# EAGLE board atmega-keyboard-v2 (EAGLE 6.2)
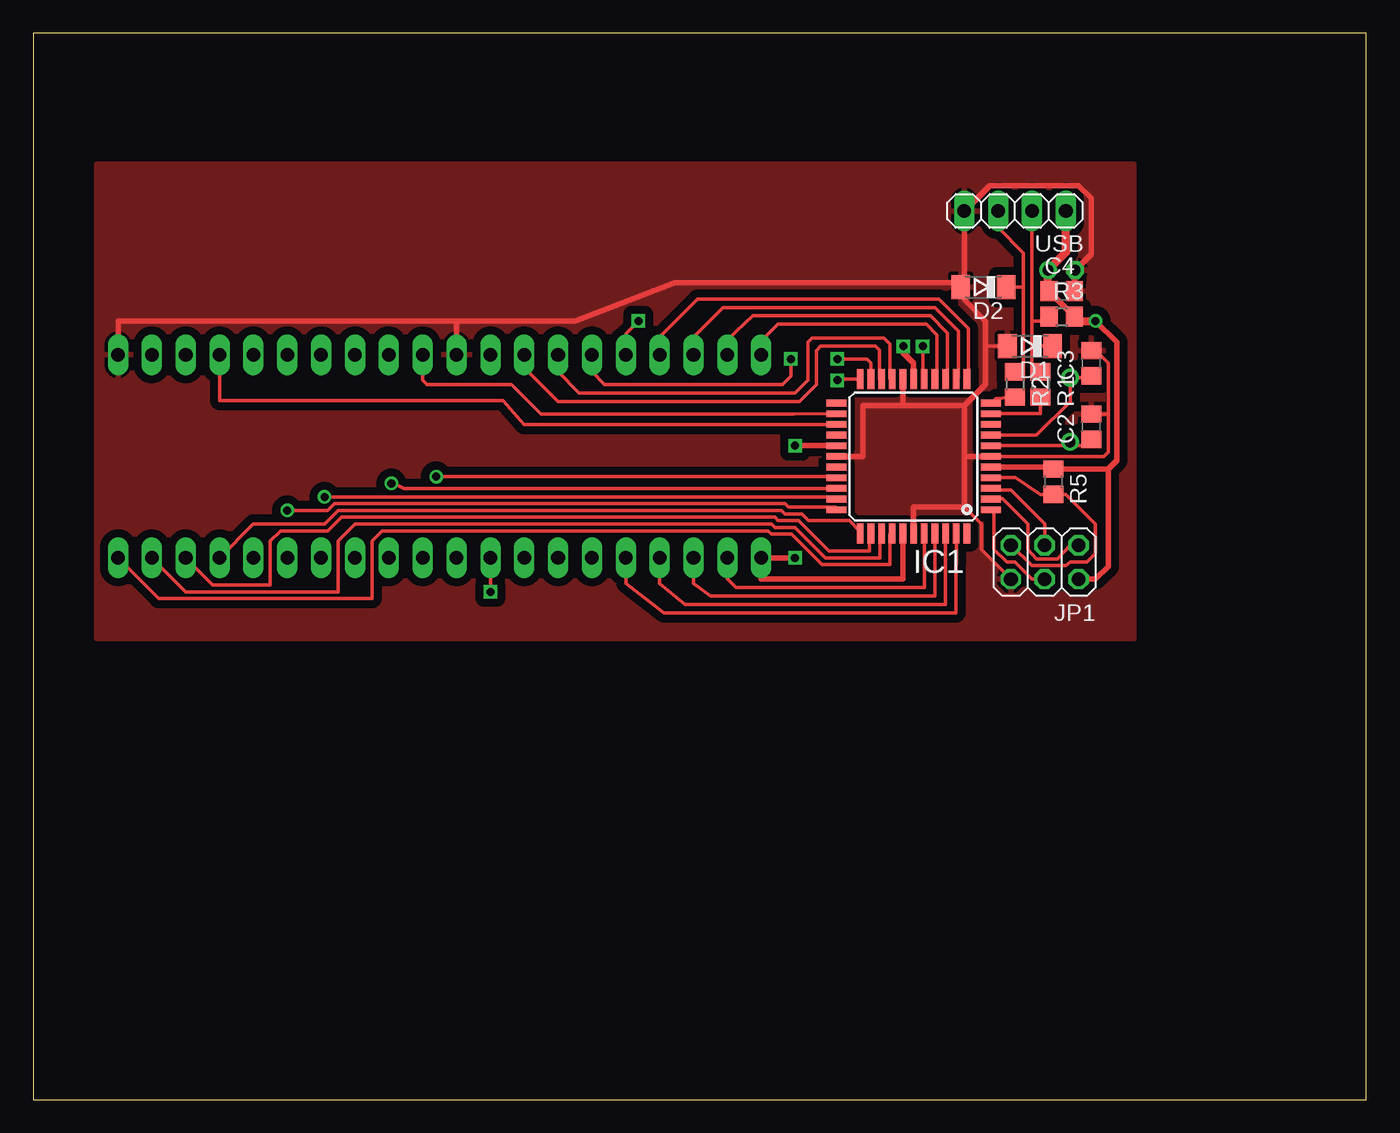
[diagram p0: board, top side]
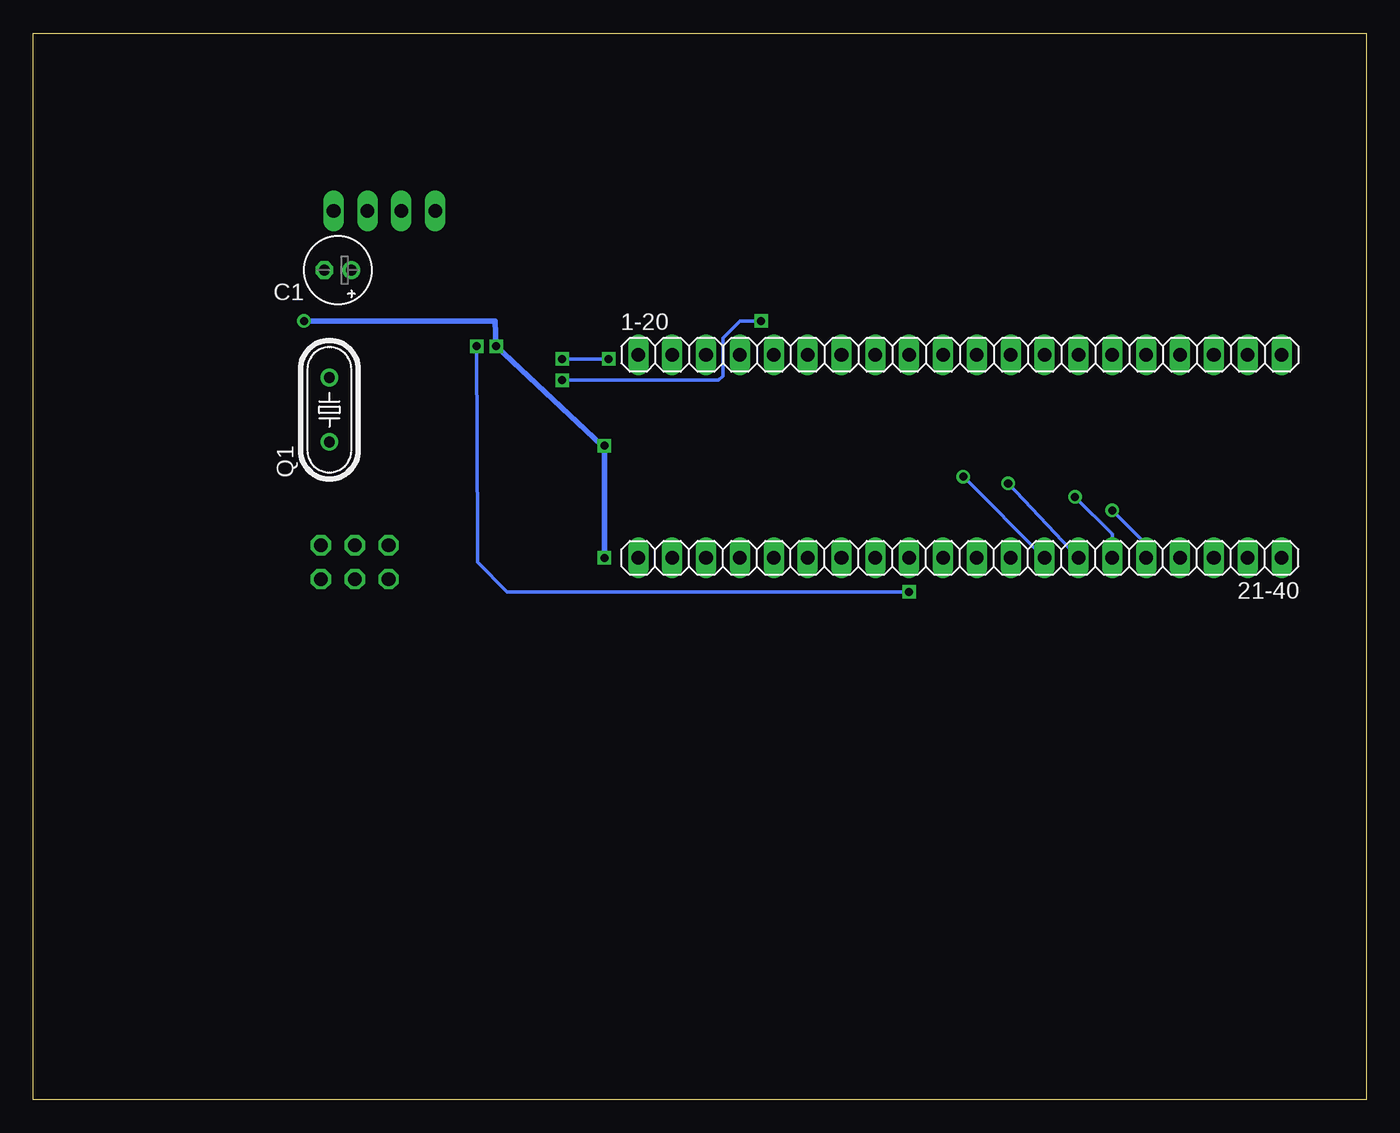
[diagram p1: board, bottom side, seen from below]

Size 100 x 80 mm. Coordinates in mm from the lower left corner, seen from the top.
Outline: 0,0 100,0 100,80 0,80 0,0
Copper layers (1*16): Top 0.035mm / dielectric 1.5mm / Bottom 0.035mm
Design rules: minimum track width 10mil, minimum drill 24mil, track to track 8mil, track to pad 8mil, pad to pad 8mil, via to via 8mil, smd to smd 8mil, copper to edge 40mil, drill to drill 8mil, minimum pad ring 10mil, minimum via ring 8mil, stop-mask expansion 4mil, vias tented up to drill 0mil, thermal gap 10mil

## Footprints (pad centres in the part's own frame; a part is rotated, then mirrored left to right if it is on the bottom)
1X20 = drill 1.016 long: 1 -24.13,0; 2 -21.59,0; 3 -19.05,0; 4 -16.51,0; 5 -13.97,0; 6 -11.43,0; 7 -8.89,0; 8 -6.35,0; 9 -3.81,0; 10 -1.27,0; 11 1.27,0; 12 3.81,0; 13 6.35,0; 14 8.89,0; 15 11.43,0; 16 13.97,0; 17 16.51,0; 18 19.05,0; 19 21.59,0; 20 24.13,0
E2-5 = drill 0.813 pad 1.27: + -1.016,0 | drill 0.813 pad 1.27 octagon: - 1.016,0
C0805 = smd 1.3 x 1.5: 1 -0.95,0; 2 0.95,0
SOD80C = smd 1.4 x 1.8: A 1.7,0; C -1.7,0
TQFP44 = smd 1.5 x 0.5: 1 -5.8,4; 2 -5.8,3.2; 3 -5.8,2.4; 4 -5.8,1.6; 5 -5.8,0.8; 6 -5.8,0; 7 -5.8,-0.8; 8 -5.8,-1.6; 9 -5.8,-2.4; 10 -5.8,-3.2; 11 -5.8,-4; 23 5.8,-4; 24 5.8,-3.2; 25 5.8,-2.4; 26 5.8,-1.6; 27 5.8,-0.8; 28 5.8,0; 29 5.8,0.8; 30 5.8,1.6; 31 5.8,2.4; 32 5.8,3.2; 33 5.8,4 | smd 0.5 x 1.5: 12 -4,-5.8; 13 -3.2,-5.8; 14 -2.4,-5.8; 15 -1.6,-5.8; 16 -0.8,-5.8; 17 0,-5.8; 18 0.8,-5.8; 19 1.6,-5.8; 20 2.4,-5.8; 21 3.2,-5.8; 22 4,-5.8; 34 4,5.8; 35 3.2,5.8; 36 2.4,5.8; 37 1.6,5.8; 38 0.8,5.8; 39 0,5.8; 40 -0.8,5.8; 41 -1.6,5.8; 42 -2.4,5.8; 43 -3.2,5.8; 44 -4,5.8
2X03 = drill 1.016 octagon: 1 -2.54,-1.27; 2 -2.54,1.27; 3 0,-1.27; 4 0,1.27; 5 2.54,-1.27; 6 2.54,1.27
HC49/S = drill 0.813: 1 -2.413,0; 2 2.413,0
R0805 = smd 1.3 x 1.5: 1 -0.95,0; 2 0.95,0
1X04 = drill 1.016 long: 1 -3.81,0; 2 -1.27,0; 3 1.27,0; 4 3.81,0

## Placement (x,y rotation side)
1-20  1-20  [1X20]  30.48,55.88 0 bottom
21-40  21-40  [1X20]  30.48,40.64 180 bottom
C1  4u7  [E2-5]  77.15,62.23 180 bottom
C2  27p  [C0805]  79.38,50.48 90 top
C3  27p  [C0805]  79.38,55.24 90 top
C4  100n  [C0805]  77.15,60.64 0 top
D1  3.6v  [SOD80C]  74.78,56.52 180 top
D2  3.6v  [SOD80C]  71.29,60.96 180 top
IC1  MEGA16-A  [TQFP44]  66.04,48.26 180 top
JP1  Programmer  [2X03]  75.88,40.32 180 top
Q1  16mhz  [HC49/S]  77.79,51.75 90 bottom
R1  68R  [R0805]  75.56,53.66 270 top
R2  68R  [R0805]  73.66,53.66 270 top
R3  1k5  [R0805]  77.15,58.74 0 top
R5  4k7  [R0805]  76.52,46.35 270 top
USB  Input  [1X04]  73.66,66.67 180 top

## Library data of the parts
1-20 21-40 JP1 USB = pinhead
C1-C4 R1-R3 R5 = rcl
D1 D2 = diode
IC1 = atmel; MPN: ATMEGA16-16AU; OC_FARNELL: 9171134; OC_NEWARK: 96K6515
Q1 = crystal; OC_FARNELL: 1667008; OC_NEWARK: unknown

## Nets
BUZZER: 21-40.12 IC1.16
CAPS_LED: 1-20.4 IC1.12
CHIP-D+: IC1.11 R2.2
CHIP-D-: IC1.10 R1.2
D+: D2.C R2.1 USB.3
D-: D1.C R1.1 R3.1 USB.2
EEP_SCL: 1-20.7 IC1.19
EEP_SDA: 1-20.8 IC1.20
FS1: 1-20.11 IC1.24
FS2: 1-20.17 IC1.25
GND: 1-20.10 1-20.20 C1.- C2.2 C3.2 C4.2 D1.A D2.A IC1.6 IC1.18 IC1.28 IC1.39 JP1.6 USB.4
KPD: 1-20.5 IC1.22
KPD_LED: 1-20.3 IC1.13
MATRIX1: 21-40.1 IC1.37
MATRIX2: 21-40.2 IC1.36
MATRIX3: 21-40.3 IC1.35
MATRIX4: 21-40.4 IC1.34
MATRIX5: 21-40.5 IC1.33
MATRIX6: 21-40.6 IC1.32
MATRIX7: 21-40.7 IC1.31
MATRIX8: 21-40.8 IC1.30
MISO: IC1.2 JP1.1
MOSI: IC1.1 JP1.4
NUM_LED: 1-20.1 IC1.15
P138_A: 21-40.19 IC1.40
P138_B: 21-40.18 IC1.41
P138_C: 21-40.17 IC1.42
P138_SEL: 21-40.16 IC1.43
PGM: 1-20.6 IC1.21
PIN9: C2.1 IC1.7 Q1.1
PIN10: C3.1 IC1.8 Q1.2
RST: IC1.4 JP1.5 R5.2
SCK: IC1.3 JP1.3
SCR_LED: 1-20.2 IC1.14
VCC: 21-40.20 C1.+ C4.1 IC1.5 IC1.17 IC1.27 IC1.38 JP1.2 R3.2 R5.1 USB.1

## Tracks (layer width: path | path; a pad name or v marks a point on that pad's centre or on a via)
BUZZER  (via drill 0.6)
  Top 0.254: v34.29,38.1 21-40.12 | IC1.16 66.74,54.16 v66.74,56.52
  Bottom 0.254: v66.74,56.52 66.67,41.91 66.67,40.32 64.45,38.1 v34.29,38.1
CAPS_LED
  Top 0.254: 1-20.4 46.99,57.21 49.85,60.07 67.94,60.07 70.17,57.85 70.17,54.19 IC1.12
CHIP-D+
  Top 0.254: R2.2 72.2,52.58 IC1.11
CHIP-D-
  Top 0.254: R1.2 75.57,51.46 IC1.10
D+
  Top 0.254: R2.1 74.3,54.61 74.3,60.96 | 74.3,60.96 74.3,63.5 72.39,65.41 USB.3 | D2.C 74.3,60.96
D-
  Top 0.254: R1.1 74.93,54.61 74.93,56.52 | 74.93,56.52 74.93,58.42 | 74.93,58.42 USB.2 | D1.C 74.93,56.52 | 75.89,58.42 74.93,58.42
  Top 0.406: R3.1 75.89,58.42
EEP_SCL
  Top 0.254: 1-20.7 39.37,54.61 40.96,53.02 57.15,53.02 58.1,53.98 58.1,56.83 58.42,57.15 63.82,57.15 64.28,56.69 64.28,54.06 IC1.19
EEP_SDA
  Top 0.254: 1-20.8 36.83,54.93 39.37,52.39 57.47,52.39 58.74,53.66 58.74,56.2 59.05,56.52 63.18,56.52 63.48,56.22 63.48,54.06 IC1.20
FS1
  Top 0.254: IC1.24 57.04,51.44 38.1,51.44 35.88,53.66 29.53,53.66 29.21,53.98 1-20.11
FS2
  Top 0.254: IC1.25 36.83,50.66 35.24,52.45 13.97,52.45 1-20.17
GND
  Top 0.254: D1.A 71.44,56.52 71.44,55.88 | D2.A 70.01,60.96 69.88,59.98 | 79.69,56.2 C3.2 79.69,55.88 80.01,55.88 80.64,55.24 80.64,51.44 | IC1.6 80.33,48.26 80.64,48.58 80.64,51.44 | C2.2 80.64,51.44 | JP1.6 71.12,41.27 71.12,43.18 69.85,44.45
  Top 0.406: 1-20.10 31.75,58.42 | 31.75,58.42 40.64,58.42 48.13,61.28 69.85,61.28 | 69.85,61.28 69.88,59.98 71.44,58.42 71.44,55.88 71.44,53.66 69.85,52.07 | 1-20.20 6.35,58.42 31.75,58.42 | IC1.18 65.24,52.07 | 65.24,52.07 69.85,52.07 | IC1.6 69.85,48.26 | 69.85,48.26 69.85,52.07 | 69.85,48.26 69.85,44.45 66.04,44.45 IC1.39 | IC1.28 62.23,48.26 62.23,52.07 65.24,52.07 | 69.85,61.28 USB.4 71.75,68.58 78.42,68.58 79.38,67.63 79.38,63.44 C1.- 78.1,62.16 C4.2
  pour Top (isolate 0.61): 4.76,70.17 82.55,70.17 82.55,34.61 4.76,34.61
KPD  (via drill 0.6)
  Top 0.254: 1-20.5 44.45,57.47 v45.4,58.42 | v60.33,53.98 60.41,54.06 IC1.22
  Bottom 0.254: v45.4,58.42 46.99,58.42 48.26,57.15 48.26,54.29 48.58,53.98 v60.33,53.98
KPD_LED
  Top 0.254: 1-20.3 49.53,57.21 51.75,59.44 67.63,59.44 69.39,57.67 69.39,54.21 IC1.13
MATRIX1
  Top 0.254: 21-40.1 9.4,37.59 25.4,37.59 25.4,41.91 26.16,42.67 55.12,42.67 55.37,42.42 56.9,42.42 59.18,40.13 64.26,40.13 64.26,42.42 IC1.37
MATRIX2
  Top 0.254: 21-40.2 11.43,38.1 22.86,38.1 22.86,41.91 24.13,43.18 55.37,43.18 55.63,42.93 57.15,42.93 59.44,40.64 63.5,40.64 63.5,42.42 IC1.36
MATRIX3
  Top 0.254: 21-40.3 13.46,38.61 17.78,38.61 17.78,41.91 18.54,42.67 22.1,42.67 23.11,43.69 55.63,43.69 55.88,43.43 57.4,43.43 59.69,41.15 62.74,41.15 62.74,42.42 IC1.35
MATRIX4
  Top 0.254: 21-40.4 16.51,43.18 21.84,43.18 22.86,44.2 56.13,44.2 56.39,43.94 57.66,43.94 58.17,43.43 61.21,43.43 61.98,42.67 IC1.34
MATRIX5  (via drill 0.61)
  Top 0.254: v19.05,44.2 22.1,44.2 22.61,44.7 56.39,44.7 56.64,44.45 60.2,44.45 IC1.33
  Bottom 0.254: v19.05,44.2 16.51,41.66 21-40.5
MATRIX6  (via drill 0.61)
  Top 0.254: v21.84,45.21 60.2,45.21 IC1.32
  Bottom 0.254: v21.84,45.21 19.05,42.42 21-40.6
MATRIX7  (via drill 0.61)
  Top 0.254: 26.73,46.35 26.94,46.26 | 26.94,46.26 27.81,45.86 IC1.31 | v26.86,46.23 26.92,46.23 26.94,46.26
  Bottom 0.254: 21-40.7 v26.86,46.23
MATRIX8  (via drill 0.61)
  Top 0.254: v30.23,46.74 60.2,46.74 IC1.30
  Bottom 0.254: 21-40.8 v30.23,46.74
MISO
  Top 0.254: JP1.1 77.79,41.59 76.83,40.54 75.25,40.54 74.61,41.27 74.61,43.18 72.71,45.09 71.86,45.09 IC1.2
MOSI
  Top 0.254: 71.88,44.2 IC1.1 72.07,44.03 72.07,41.27 73.03,40.32 73.66,40.32 74.93,39.05 JP1.4
NUM_LED
  Top 0.254: 1-20.1 54.61,56.9 55.88,58.17 66.99,58.17 67.79,57.37 67.79,54.21 IC1.15
P138_A
  Top 0.254: 21-40.19 52.07,39.05 52.7,38.42 66.84,38.42 IC1.40
P138_B
  Top 0.254: 21-40.18 49.53,38.73 50.8,37.78 67.64,37.78 IC1.41
P138_C
  Top 0.254: 21-40.17 46.99,38.73 48.9,37.15 68.44,37.15 IC1.42
P138_SEL
  Top 0.254: 21-40.16 44.45,38.73 47.31,36.51 69.22,36.51 69.22,37.7 IC1.43
PGM  (via drill 0.6)
  Top 0.254: v56.83,55.56 56.83,54.29 56.2,53.66 42.86,53.66 41.91,54.61 1-20.6 | IC1.21 62.84,55.27 62.55,55.56 v60.33,55.56
  Bottom 0.254: v60.33,55.56 v56.83,55.56
PIN9
  Top 0.254: C2.1 arc-90 79.18,49.34 78.9,49.06 77.79,49.06 | 77.79,49.06 IC1.7 | Q1.1 77.79,49.06
PIN10
  Top 0.254: IC1.8 75.26,49.86 77.79,52.39 Q1.2 79.25,54.17 arc90 C3.1
RST
  Top 0.254: IC1.4 73.67,46.66 75.56,45.41 R5.2 77.16,45.4 77.47,45.4 79.69,43.18 79.69,40.96 79.06,40.32 77.79,40.32 77.47,40.08 74.93,40.08 JP1.5
SCK
  Top 0.254: JP1.3 75.88,43.18 73.34,45.72 71.98,45.72 IC1.3
SCR_LED
  Top 0.254: 1-20.2 52.07,57.02 53.98,58.8 67.31,58.8 68.59,57.52 68.59,54.21 IC1.14
VCC  (via drill 0.6)
  Top 0.254: 76.14,60.71 78.42,58.42
  Top 0.406: IC1.17 66.04,55.24 65.28,56.01 v65.28,56.52 | R3.2 C4.1 76.14,60.71 | v57.15,40.64 21-40.20 54.61,39.05 65.24,39.05 IC1.38 | IC1.27 v57.15,49.06 | v79.69,58.42 81.28,56.83 81.28,47.94 80.64,47.3 | 80.64,47.3 R5.1 76.36,47.46 IC1.5 | 80.64,47.3 80.64,40.01 79.69,39.05 JP1.2
  Top 0.61: 76.14,60.71 C1.+ 77.47,63.56 USB.1 | 78.42,58.42 v79.69,58.42
  Bottom 0.406: v57.15,40.64 v57.15,49.06 57.31,49.06 v65.28,56.52 65.34,58.42 v79.69,58.42